# EAGLE board SingleFader (EAGLE 7.4.0)
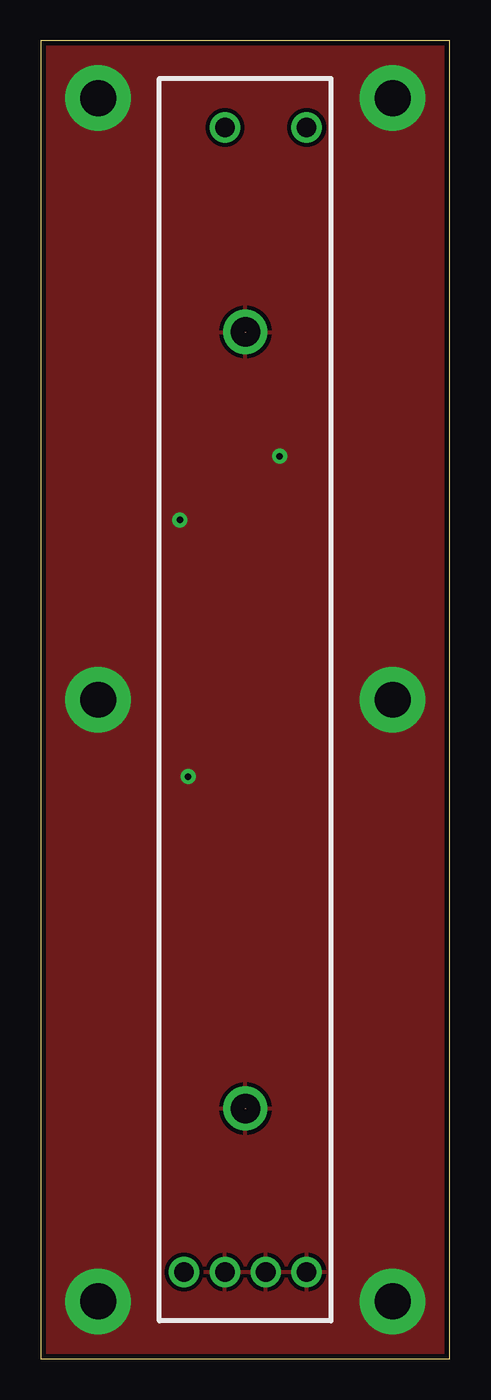
[diagram p0: board, top side]
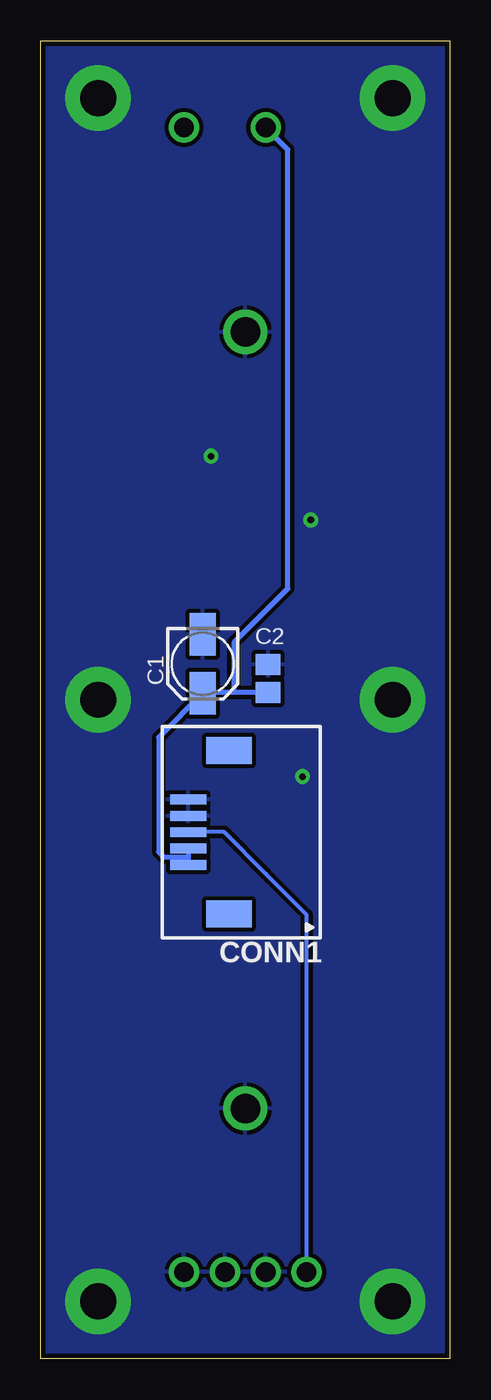
[diagram p1: board, bottom side, seen from below]

Size 25 x 80.6 mm. Coordinates in mm from the lower left corner, seen from the top.
Outline: 0,80.6 0,0 25,0 25,80.6 0,80.6
Copper layers (1*16): Top 0.035mm / dielectric 1.5mm / Bottom 0.035mm
Design rules "smiery": minimum track width 10mil, minimum drill 12mil, track to track 7mil, track to pad 5mil, pad to pad 5mil, via to via 6mil, smd to smd 0mil, copper to edge 12mil, drill to drill 10mil, minimum pad ring 13mil, minimum via ring 10mil, stop-mask expansion 2mil, vias tented up to drill 25mil, thermal gap 10mil

## Footprints (pad centres in the part's own frame; a part is rotated, then mirrored left to right if it is on the bottom)
153CLV-0405 = smd 2.6 x 1.6: + 1.8,0; - -1.8,0
C0805 = smd 1.3 x 1.5: 1 -0.85,0; 2 0.85,0
MOLEX-52271-0579 = smd 0.6 x 2.2: 1 -2,3.5; 2 -1,3.5; 3 0,3.5; 4 1,3.5; 5 2,3.5 | smd 1.65 x 2.8: S1 -5,1; S2 5,1
RS6011*P = drill 1.2: 1 -35,1.25; 2 -35,3.75; 3 35,1.25; S1 -35,-1.25; S2 -35,-3.75; S5 35,-3.75 | drill 1.8: S3 -25,0; S4 22.5,0

## Placement (x,y rotation side)
C1  10u  [153CLV-0405]  15.1,42.5 270 bottom
C2  100n  [C0805]  11.1,41.6 90 bottom
CONN1  PINHD-1X05-FFC-1MM-Z  [MOLEX-52271-0579]  12.5,32.2 90 bottom
R1  RS6011P  [RS6011*P]  12.5,40.3 90 top

## Library data of the parts
C1 = igor_lbr; MANUFACTURER: Multicomp; MPN: MCVVT016M100CA1L
C2 R1 = igor_lbr
CONN1 = igor_lbr; MANUFACTURER: Molex; MPN: 52271-0579

## Nets
+3V3: C1.+ C2.1 CONN1.1 CONN1.2 R1.3
FADER: CONN1.3 R1.2
GND: C1.- C2.2 CONN1.4 CONN1.5 R1.1 R1.S1 R1.S2 R1.S3 R1.S4

## Tracks (layer width: path | path; a pad name or v marks a point on that pad's centre or on a via)
+3V3
  Bottom 0.305: C2.1 13.2,40.75 | 13.2,40.75 15.05,40.75 C1.+ 17.8,38 17.8,31 17.5,30.7 16,30.7 | 13.2,40.75 13.2,43.8 9.9,47.1 9.9,73.95 R1.3 | CONN1.2 16,30.7 | 16,30.7 CONN1.1
FADER
  Bottom 0.254: CONN1.3 13.8,32.2 11.25,29.65 11,29.4 8.75,27.15 R1.2
GND  (via drill 0.4 pad 0.6, 2.2 pad 4)
  other vias: 3.5,3.5 21.5,3.5 3.5,77.1 21.5,77.1 3.5,40.3 21.5,40.3 14.6,55.2 8.5,51.3 9,35.6
  pour Top (isolate 0.254): 0,80.6 0,0 25,0 25,80.6
  pour Bottom (isolate 0.254): 0,80.6 0,0 25,0 25,80.6